# Altium PCB BRD131208.pcbdoc
Units mil, origin at the board's own origin, x right, y up, seen from the top; angles counter-clockwise.
Board outline 2755.91 x 3543.31 mil, 2 copper layers (Top Layer, Bottom Layer), stack 63.824 mil thick; 51 components, 43 nets, 173 pads, 53 vias.
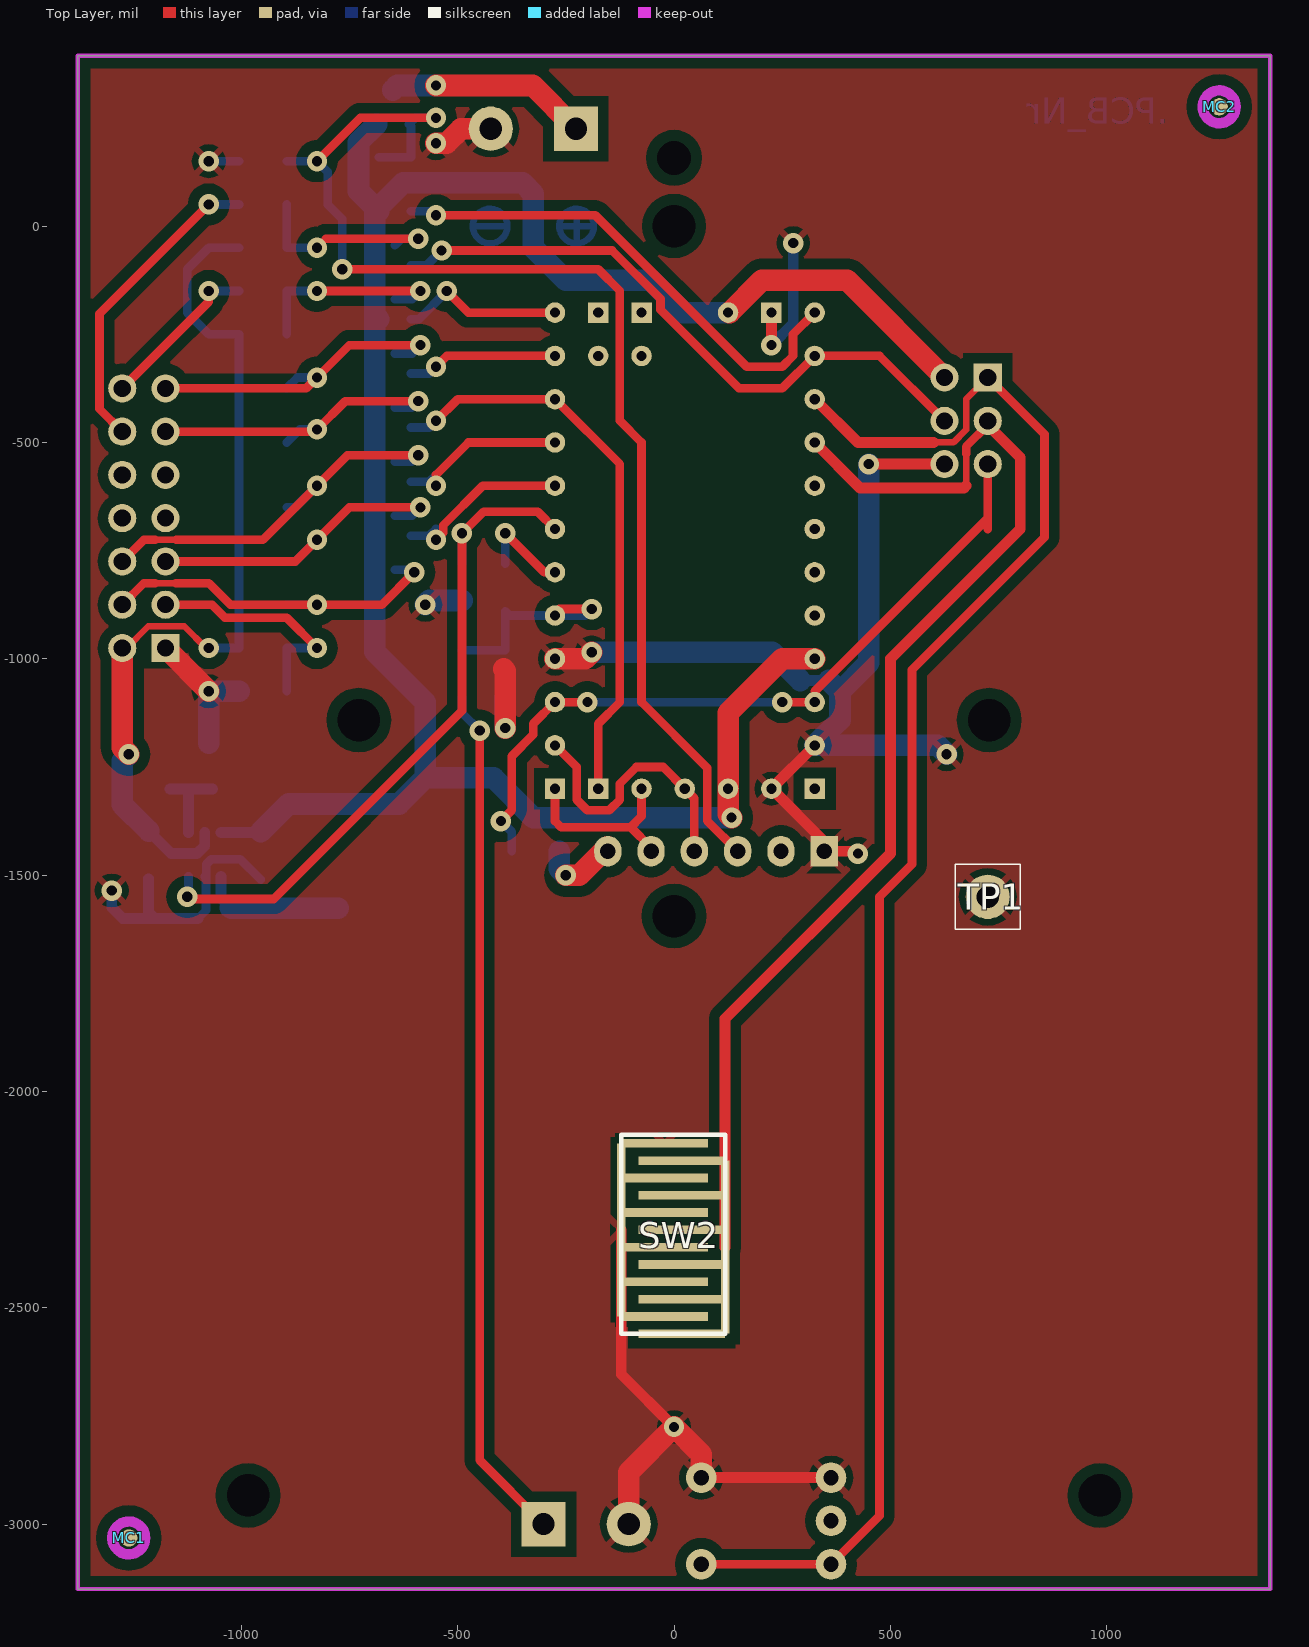
[diagram p0: Top Layer view]
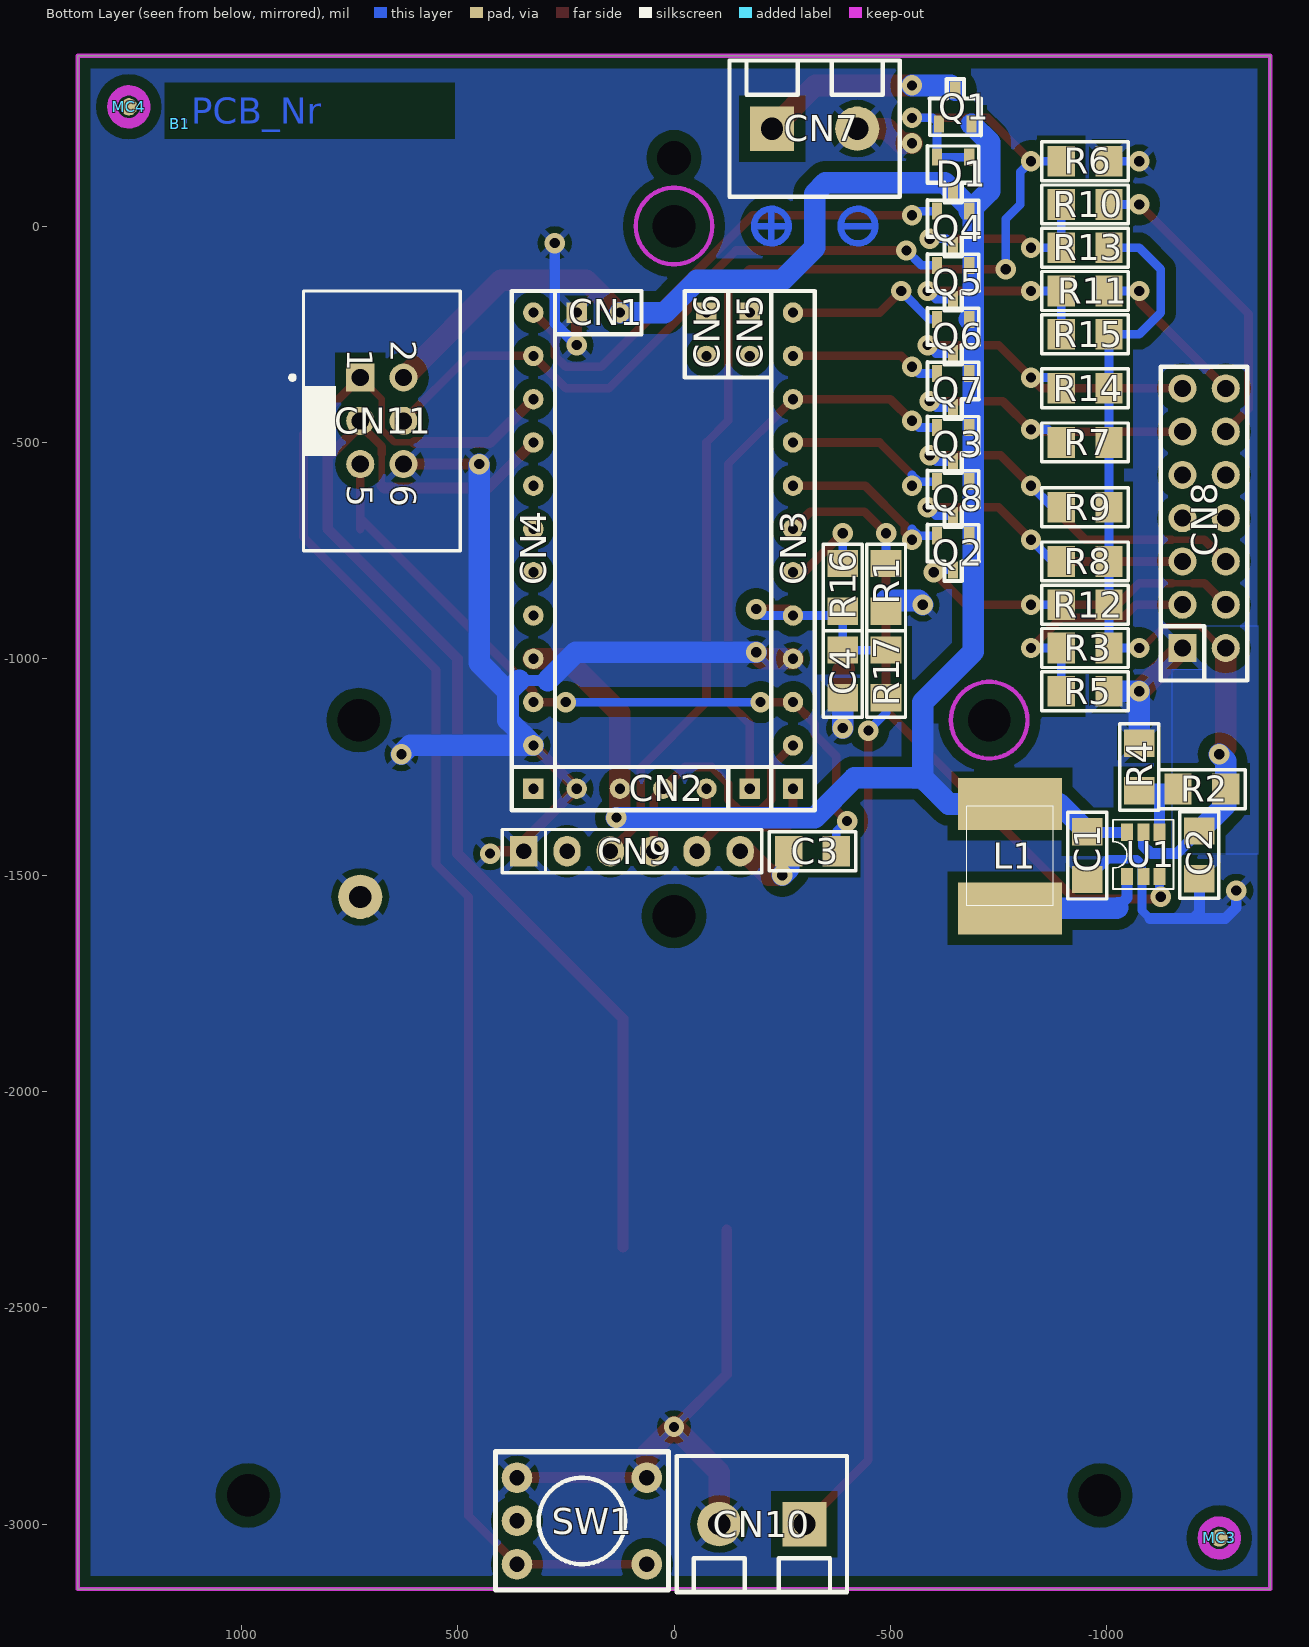
[diagram p1: Bottom Layer view, seen from below]
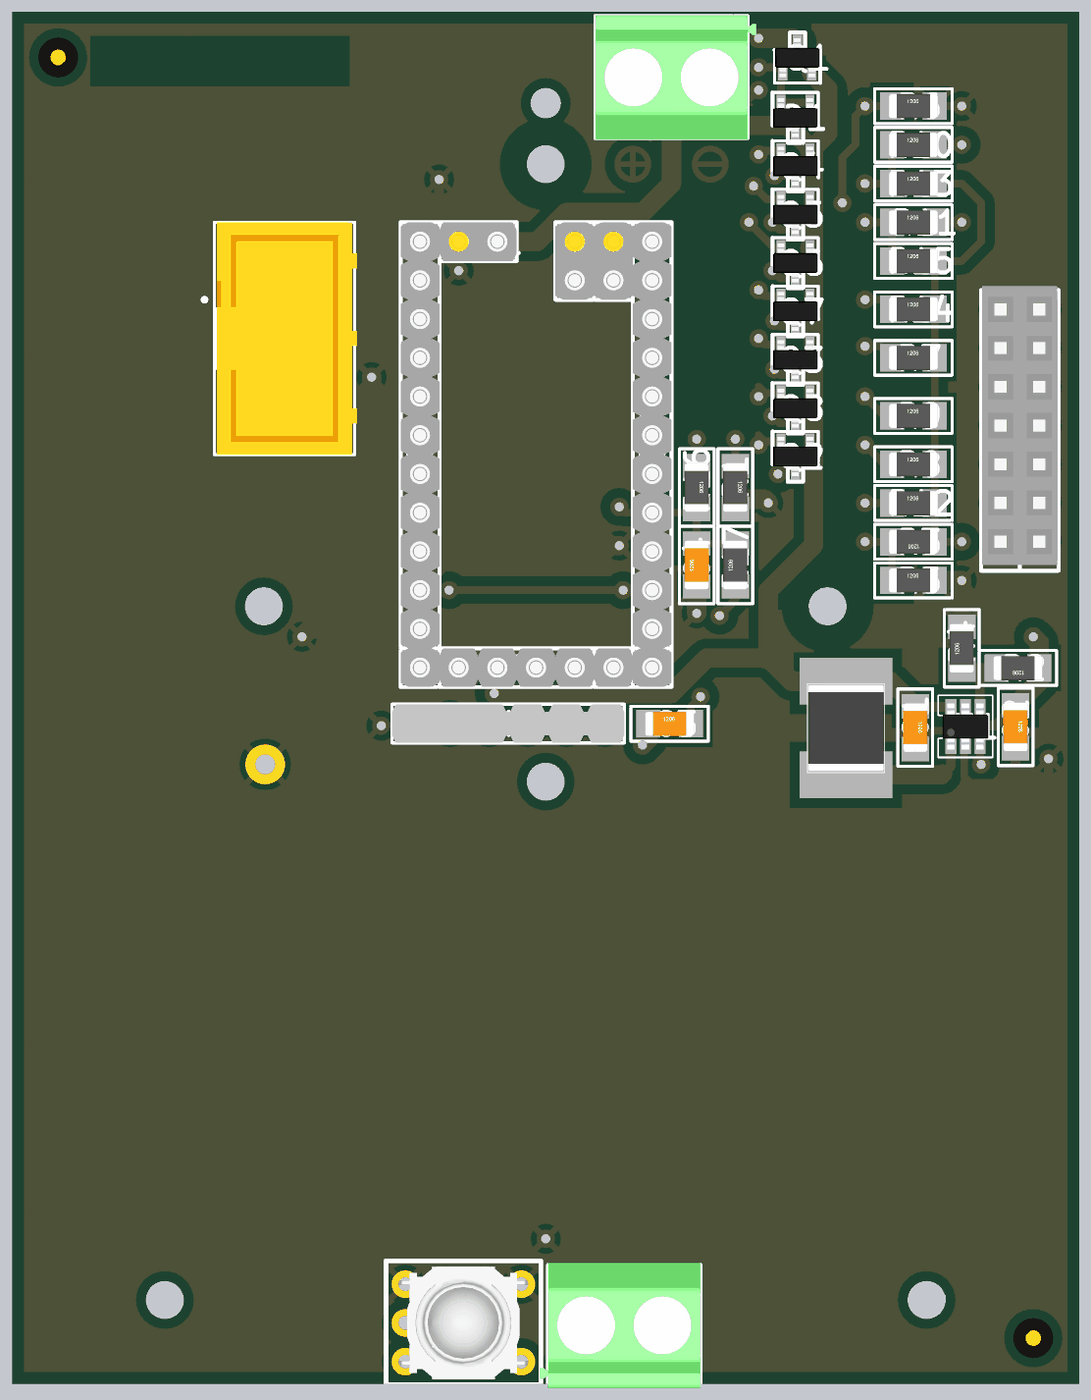
[diagram p2: 3D render of the assembled board from below, using the file's embedded part models]

## Layer stack, top to bottom
Top Layer: signal copper 1.4
Dielectric: core 61.0236, FR-4, Dk 4.8
Bottom Layer: signal copper 1.4

## Board outline
-1377.95,-3149.61 1377.95,-3149.61 1377.95,393.7 -1377.95,393.7

## Design rules (kind name [scope] priority, off if disabled: settings)
Clearance SC_SOT23-6 [HasFootprint('SC_SOT23-6') vs HasFootprint('SC_SOT23-6')] p1: gap=9
Clearance Clearance_polygons [InPolygon] p2: gap=25
Clearance Clearance_All [All] p3: gap=10
HoleSize [All] p1: absolutevalues=TRUE maxlimit=125.98 minlimit=23.62 maxpercent=80.000 minpercent=20.000
MinimumAnnularRing [All] p1: minimumring=10
MinimumSolderMaskSliver SilkscreenOverComponentPads [All] p2: minsoldermaskwidth=10
PlaneClearance [All] p1: clearance=50
PolygonConnect [All] p1: connectstyle=Relief reliefconductorwidth=15 reliefentries=4 polygonreliefangle="45 Angle" airgapwidth=15
RoutingVias [All] p1: holewidth=23.62 width=47.24 viastyle="Through Hole" minholewidth=23.62 minwidth=47.24 maxholewidth=23.62 maxwidth=47.24
SolderMaskExpansion [All] p1: expansion=0
Width [All] p1: maxlimit=50 minlimit=15 preferedwidth=20
26 further rules are at their usual default settings.

## Components (designator, comment, footprint, x,y, rotation, side; value= is the part's Value field where it differs from the comment)
B1 "BRD131208/1" MC_BoardNr 1141.73,236.22 r180 bottom
C1 "YCAM10U" CA_1206 -955,-1455 r270 bottom
C2 "YCAM10U" CA_1206 -1214,-1453 r270 bottom
C3 "YCAM100N" CA_1206 -320,-1445 r180 bottom
C4 "YCAM100N" CA_1206 -390,-1035 r90 bottom
CN1 "TS-102-G-AA" CN_TERMINALSTRIP_2P 225,-200 r180 bottom
CN2 "TS-105-G-A" CN_TERMINALSTRIP_5P -175,-1300 r0 bottom
CN3 "TS-112-G-A" CN_TERMINALSTRIP_12P -275,-1300 r90 bottom
CN4 "TS-112-G-A" CN_TERMINALSTRIP_12P 325,-1300 r90 bottom
CN5 "TS-102-G-AA" CN_TERMINALSTRIP_2P -175,-200 r270 bottom
CN6 "TS-102-G-AA" CN_TERMINALSTRIP_2P -75,-200 r270 bottom
CN7 "CNTRB002" "CN_MKDSN 1,5/2" -325,225 r180 bottom
CN8 "SSW-107-01-T-D" CN_SCKT2X7 -1175,-975 r90 bottom
CN9 "CNHDR036M3-1/6" CN_HDR1X6 347.05,-1444.5 r180 bottom
CN10 "CNTRB002" "CN_MKDSN 1,5/2" -202.95,-2999.61 r0 bottom
CN11 "0918_506_7324" CN_HARTING_918506X324 725,-350 r270 bottom
D1 "YDIOBAT54-1" SC_SOT23 -645,120 r270 bottom
L1 "4u7/2.7A" CL_STD_2220 -776,-1456 r270 bottom
MC1 "Fiducial" MC_FIDUCIAL -1259.84,-3031.5 r0 top
MC2 "Fiducial" MC_FIDUCIAL 1259.84,275.59 r0 top
MC3 "Fiducial" MC_FIDUCIAL -1259.84,-3031.5 r180 bottom
MC4 "Fiducial" MC_FIDUCIAL 1259.84,275.59 r180 bottom
Q1 "YTRS2035" SC_SOT23 -650,275 r90 bottom
Q2 "YTRSFDV301N" SC_SOT23 -645,-755 r270 bottom
Q3 "YTRSFDV301N" SC_SOT23 -645,-505 r270 bottom
Q4 "YTRSFDV301N" SC_SOT23 -645,-5 r270 bottom
Q5 "YTRSFDV301N" SC_SOT23 -645,-130 r270 bottom
Q6 "YTRSFDV301N" SC_SOT23 -645,-255 r270 bottom
Q7 "YTRSFDV301N" SC_SOT23 -645,-380 r270 bottom
Q8 "YTRSFDV301N" SC_SOT23 -645,-630 r270 bottom
R1 "YRES100K" RE_1206 -490,-835 r270 bottom
R2 "470K/1%" RE_1206 -1220,-1301 r0 bottom
R3 "YRES10K" RE_1206 -950,-975 r0 bottom
R4 "150K / 1%" RE_1206 -1075,-1250 r90 bottom
R5 "YRES330E" RE_1206 -950,-1075 r180 bottom
R6 "YRES100K" RE_1206 -950,150 r180 bottom
R7 "YRES100K" RE_1206 -950,-500 r180 bottom
R8 "YRES100K" RE_1206 -950,-775 r180 bottom
R9 "33K/1%" RE_1206 -950,-650 r180 bottom
R10 "YRES820E" RE_1206 -950,50 r180 bottom
R11 "YRES820E" RE_1206 -950,-150 r180 bottom
R12 "YRES100K" RE_1206 -950,-875 r180 bottom
R13 "YRES100K" RE_1206 -950,-50 r180 bottom
R14 "YRES100K" RE_1206 -950,-375 r180 bottom
R15 "YRES100K" RE_1206 -950,-250 r180 bottom
R16 "YRES0E" RE_1206 -390,-835 r270 bottom
R17 "YRES330E" RE_1206 -490,-1035 r90 bottom
SW1 "KSJ0M411" SW_KSJ-M 362.8,-2992.13 r180 bottom
SW2 "PCB" SW_PCB 118.11,-2099.61 r180 top
TP1 "CN001M1" CN_TP_TH_1.3mm 725,-1550 r0 top
U1 "MCP1640T-I/CHY" SC_SOT23-6 -1047,-1503 r90 bottom

## Footprints (in the part's own frame and the unit in brackets; to place one, negate y for a bottom-side part, rotate by r counter-clockwise, add the part's x,y. Pads: shape width x height; smd on the part's side, far side on the other; paste and mask are expansions set on the pad)
CA_1206 [mm] "Chip Capacitor; Body 3.2 x 1.6 mm (LxW typ)"
  rect 1.6x1.8 smd: 1(-1.4,0) 2(1.4,0)
  silkscreen extent -2.54,-1.14 2.54,1.14, body extent -1.6,-0.8 1.6,0.8, height 1
CL_STD_2220 [mm]
  rect 3.06x6.1 smd: 1(-3.065,0) 2(3.065,0)
  silkscreen extent -2.92,-2.54 2.92,2.54, body extent -2.85,-2.5 2.85,2.5, height 2.5
CN_HARTING_918506X324 [mm] "Connector; IDC, Low Profile Male Header, Thru-Hole; 6 Position; Vertical; Pitch 2.54 mm; Body 15.24 x 9.2 x 9.45 mm (LxWxH)"
  rect 1.65x1.65 hole 1: 1(0,0)
  round 1.65 hole 1: 2(0,2.54) 3(2.54,0) 4(2.54,2.54) 5(5.08,0) 6(5.08,2.54)
  silkscreen extent -5.08,-4.11 10.16,5.87, body extent -5.08,-3.18 10.16,6.02, height 9.45
CN_HDR1X6 [mm] "Connector; Header; 6 Position"
  rect 1.6x1.8 hole 0.9: 1(0,0)
  oval 1.6x1.8 hole 0.9: 2(2.54,0) 3(5.08,0) 4(7.62,0) 5(10.16,0) 6(12.7,0)
  silkscreen extent -1.27,-1.27 13.97,1.27, body extent -1.27,-1.27 13.97,1.27, height 9.26
"CN_MKDSN 1,5/2" [mm] "Printed screw termination blocks"
  rect 2.6x2.6 hole 1.3: 1(-2.5,0)
  round 2.6 hole 1.3: 2(2.5,0)
  silkscreen extent -5,-4 5,4, body extent -5,-4.1 5.57,4.05, height 10
CN_SCKT2X7 [mm] "Samtec SSW-107-01-T-D"
  rect 1.65x1.65 hole 1: 1(0,0)
  round 1.65 hole 1: 2(0,-2.54) 3(2.54,0) 4(2.54,-2.54) 5(5.08,0) 6(5.08,-2.54) 7(7.62,0) 8(7.62,-2.54) 9(10.16,0) 10(10.16,-2.54) 11(12.7,0) 12(12.7,-2.54) 13(15.24,0) 14(15.24,-2.54)
  silkscreen extent -1.91,-3.81 16.51,1.27, body extent -1.52,-3.75 16.76,1.21, height 8.51
CN_TERMINALSTRIP_2P [mm] "TS-102-G-A"
  rect 1.2x1.2 hole 0.6: 1(0,0)
  round 1.2 hole 0.6: 2(2.54,0)
  silkscreen extent -1.27,-1.27 3.81,1.27, body extent -1.27,-1.27 3.81,1.27, height 4.44
CN_TERMINALSTRIP_5P [mm] "TS-105-G-A / Samtec SS-105"
  rect 1.2x1.2 hole 0.6: 1(0,0)
  round 1.2 hole 0.6: 2(2.54,0) 3(5.08,0) 4(7.62,0) 5(10.16,0)
  silkscreen extent -1.27,-1.27 11.43,1.27, body extent -1.27,-1.27 11.43,1.27, height 4.44
CN_TERMINALSTRIP_12P [mm] "TS-112-G-A"
  rect 1.2x1.2 hole 0.6: 1(0,0)
  round 1.2 hole 0.6: 2(2.54,0) 3(5.08,0) 4(7.62,0) 5(10.16,0) 6(12.7,0) 7(15.24,0) 8(17.78,0) 9(20.32,0) 10(22.86,0) 11(25.4,0) 12(27.94,0)
  silkscreen extent -1.27,-1.27 29.21,1.27, body extent -1.27,-1.27 29.21,1.27, height 4.44
CN_TP_TH_1.3mm [mm]
  round 2.6 hole 1.3: 1(0,0)
  silkscreen extent -1.91,-1.91 1.91,1.91, body extent -2.98,-2.99 3,2.99, height 1
MC_BoardNr [mil] "Board number"
MC_FIDUCIAL [mil] "Fiducial"
  round 40 smd paste-3937.01 mask+31.5: 0(0,0)
  Top Layer keep-out circle w24: c0,0 r38
RE_1206 [mm] "Chip Resistor; Body 3.2 x 1.6 mm (LxW typ)"
  rect 1.6x1.8 smd: 1(-1.4,0) 2(1.4,0)
  silkscreen extent -2.54,-1.14 2.54,1.14, body extent -1.6,-0.8 1.6,0.8, height 1
SC_SOT23 [mm] "SOT23, 3-Leads, Body 2.9x1.3mm, Pitch 0.95mm, Lead Span 2.3mm, IPC High Density"
  rect 1x0.6 smd: 1(-1,0.95) 2(-1,-0.95) 3(1,0)
  silkscreen extent -1.65,-1.5 1.65,1.5, body extent -1.27,-1.46 1.27,1.46, height 0.99
SC_SOT23-6 [mil] "SC_SOT23-6"
  rect 40x28 smd: 1(0,0) 2(0,-37.5) 3(0,-75) 4(102,-75) 5(102,-37.5) 6(102,0)
  silkscreen extent -29,-108 131,32, body extent -8,-97 110,22, height 51
SW_KSJ-M [mm] "C&K SPST switch"
  round 1.8 hole 0.9: 0(0,0) 1(0,-2.54) 1(7.62,-2.54) 2(0,2.54) 2(7.62,2.54)
  silkscreen extent -1.27,-4.06 8.89,4.06, body extent -0.65,-3.7 8.27,3.7, height 6.63
SW_PCB [mil]
  rect 20x400 smd: 1(0,260) 2(240,220)
  rect 200x20 smd: 1(100,460) 1(100,300) 1(100,380) 1(100,220) 1(100,60) 1(100,140) 2(140,420) 2(140,180) 2(140,260) 2(140,340) 2(140,20) 2(140,100)
  silkscreen extent 0,0 240,460

## Part data
B1: library part BARE_PCB
CN3 CN4 CN9: "*"
D1: "Dual Schottky Barrier Diode Common Cathode"
L1: library part LQH55DN4R7M03L
R1 R3 R5 R6 R7 R8 R10 R11 R12 R13 R14 R15 R16 R17: "Resistor"
R2: library part CRCW1206470KFKEA, "Resistor"
R4: library part RC1206FR-07150KL, "Resistor"
R9: library part MCMR12X3302FTL, "Resistor"
SW2: library part PCB_SWITCH

## Free pads (board coordinates)
  round 0 hole 78.74 unplated mask+39.37: 0(0,157.48)
  round 0 hole 98.43 unplated mask+49.21: 1(0,0) 2(-728.35,-1141.73) 3(728.35,-1141.73) 4(0,-1594.49) 5(-984.25,-2933.07) 6(984.25,-2933.07)

## Via types
v1: diameter 47.24, hole 23.62, Top Layer to Bottom Layer, tented both sides, 53 vias

## Nets (pads, with @x,y where several pads share a name; then routed paths per layer and width w, separated by ;. In a path a pad name is that pad's centre, name@x,y a point inside that pad or via, vN(x,y) a via of type N, cw(c..) or ccw(c..) an arc to the next point about the centre after c; other vN are vias at no path point)
+5V: C1.1 CN1.2 CN2.4 CN4.4 CN11.2 D1.3 L1.1 Q1.2 Q2.1 Q3.1 Q4.1 Q5.1 Q6.1 Q7.1 Q8.1 U1.6 | length 5034.7
  Top Layer w50: CN1.2@128.26,-200 203.26,-125 400,-125 CN11.2 ; v1(133.1,-1366.9) 125,-1358.8 CN2.4 125,-1125 250,-1000 CN4.4
  Bottom Layer w25: U1.6 -956.12,-1401 C1.1
  Bottom Layer w50: C1.1 -890.45,-1335.33 L1.1 -635.33,-1335.33 -575,-1275 ; Q1.2 -687.4,235.36 -729.21,193.55 -729.21,81.18 Q4.1@-686.83,38.8 ; Q6.1 Q6.1@-691.81,-215.63 ; Q4.1 Q4.1@-686.83,38.8 ; CN1.2 21.74,-200 -53.26,-125 -250,-125 -325,-50 -325,75 -350,100 -625.63,100 D1.3 Q4.1@-686.83,38.8 ; v1(133.1,-1366.9) -325.19,-1366.9 -417.1,-1275 -575,-1275 ; Q6.1@-691.81,-215.63 -691.81,-983.19 -575,-1100 -575,-1275 ; Q6.1@-691.81,-215.63 -691.81,33.82 Q4.1@-686.83,38.8
+9V: CN4.1
AIN0: CN4.8
AIN1: CN4.7
AIN2: CN4.6
AIN3: CN4.5
AIN4: CN5.1
AIN5: CN6.1
AIN6: CN5.2
AIN7: CN6.2
DB4: CN8.11 Q7.3 R7.1 | length 755.3
  Top Layer w20: CN8.11 -830,-475 v1(-825,-470) -759.52,-404.52 v1(-591.16,-404.52)
  Bottom Layer w20: R7.1 -864.88,-470 v1(-825,-470) ; Q7.3 -606.01,-419.37 v1(-591.16,-404.52)
DB5: CN8.12 R10.2 | length 721.2
  Top Layer w20: CN8.12 -1327.48,-422.52 -1327.48,-202.48 v1(-1075,50)
  Bottom Layer w20: v1(-1075,50) R10.2
DB6: CN8.13 Q6.3 R14.1 | length 777.8
  Top Layer w20: CN8.13 -850,-375 v1(-825,-350) -750,-275 v1(-585.94,-275)
  Bottom Layer w20: R14.1 -869.88,-350 v1(-825,-350) ; Q6.3 -605.31,-294.37 v1(-585.94,-275)
DB7: CN8.14 R11.2 | length 377.7
  Top Layer w20: CN8.14 -1075,-175 v1(-1075,-150)
  Bottom Layer w20: v1(-1075,-150) R11.2
DIO2: C4.2 CN3.5 R16.2 R17.2 | length 475.1
  Top Layer w20: CN3.5@-265,-885 v1(-190,-885)
  Bottom Layer w20: R17.2 C4.2 R16.2 -380.12,-900 CN3.5 -205,-900 v1(-190,-885)
DIO3: CN3.6 R16.1 | length 222.2
  Top Layer w20: v1(-390,-710) -300,-800 CN3.6
  Bottom Layer w20: R16.1 v1(-390,-710)
DIO4: CN3.7 R1.1 U1.3 | length 1597.7
  Top Layer w20: v1(-1125,-1550) -1120,-1555 -925,-1555 -490,-1120 v1(-490,-710) -440,-660 -315,-660 CN3.7
  Bottom Layer w20: v1(-1125,-1550) -1122,-1547 U1.3 ; R1.1 v1(-490,-710)
DIO5: CN3.8 Q2.2 | length 400.6
  Top Layer w20: v1(-550,-725) -533.62,-708.62 -533.62,-691.93 -441.69,-600 CN3.8
  Bottom Layer w20: Q2.2 -565.63,-715.63 -550,-700
DIO6: CN3.9 Q8.2 | length 370.1
  Top Layer w20: -550,-575 -475,-500 CN3.9
  Bottom Layer w20: Q8.2 -565.63,-590.63 -550,-575
  other v1: -550,-600
DIO7: CN2.1 CN3.10 Q3.2 | length 1342.6
  Top Layer w20: v1(-550,-450) -500,-400 CN3.10 -125,-550 -125,-1100 -175,-1150 CN2.1
  Bottom Layer w20: Q3.2 -565.63,-465.63 v1(-550,-450)
DIO8: CN3.11 Q7.2 | length 349.4
  Top Layer w20: v1(-550,-325) -525,-300 CN3.11
  Bottom Layer w20: Q7.2 -565.63,-340.63 v1(-550,-325)
DIO9: CN3.12 Q6.2 | length 380.9
  Top Layer w20: v1(-525,-150) -475,-200 CN3.12
  Bottom Layer w20: Q6.2 -589.88,-215.63 -525,-150.75 v1(-525,-150)
DIO10: CN4.12 Q4.2 | length 1162.5
  Top Layer w20: v1(-550,25) -182.04,25 167.96,-325 250,-325 275,-300 275,-250 CN4.12
  Bottom Layer w20: Q4.2 -559.37,34.37 v1(-550,25)
DIO11: CN4.11 CN11.4 Q5.2 | length 1468.5
  Top Layer w20: v1@-518.62,-56.38 -143.09,-56.38 -31.38,-168.09 -31.38,-193.62 150,-375 250,-375 CN4.11 475,-300 CN11.4
  Bottom Layer w20: Q5.2 -571.31,-90.63 v1(-537.06,-56.38)
DIO12: CN4.10 CN11.1 SW1.1 | length 3845.7
  Top Layer w15: 600.02,-499.98 645.7,-499.98 674.98,-470.7 674.98,-400.02 CN11.1
  Top Layer w20: SW1.1@62.8,-3092.13 362.8,-3092.13 475,-2979.92 475,-1550 550,-1475 550,-1025 856.1,-718.9 856.1,-481.1 CN11.1
  Top Layer w25: CN4.10 425,-500 600,-500
DIO13: CN4.9 CN11.3 SW2.1 | length 2770.2
  Top Layer w15: 675,-600 675,-525.78
  Top Layer w20: 675,-525.78 675,-509.57 CN11.3@725,-459.57
  Top Layer w25: SW2.1@118.11,-2359.61 118.11,-1831.89 500,-1450 500,-1000 800,-700 800,-534.57 CN11.3@725,-459.57 ; CN4.9 429.98,-604.98 670.02,-604.98 675,-600
E: CN8.6 Q3.3 R9.1 | length 936.1
  Top Layer w15: -1199.22,-725 -1150,-725
  Top Layer w20: CN8.6 -1225,-725 -1199.22,-725 ; -1150,-725 -950,-725 v1(-825,-600) -754.52,-529.52 v1(-591.16,-529.52)
  Bottom Layer w20: R9.1 -875,-650 v1(-825,-600) ; Q3.3 -606.01,-544.37 v1(-591.16,-529.52)
GND: C1.2 C2.2 C4.1 CN1.1 CN2.5 CN3.4 CN4.2 CN7.2 CN8.1 CN9.1 CN10.2 CN11.6 R1.2 R4.2 R5.2 R6.2 SW1.2 SW2.2 TP1.1 U1.2 | length 5329.1
  Top Layer w25: SW2.2@-121.89,-2319.61 -121.89,-2653.11 v1(0,-2775) ; SW1.2@62.8,-2892.13 SW1.2@362.8,-2892.13 ; v1(225,-275) CN1.1 ; CN4.2 CN2.5 347.05,-1422.05 CN9.1 419.5,-1444.5 v1(425,-1450) ; v1(450,-550) CN11.6
  Top Layer w50: CN8.1 v1(-1075,-1075) ; v1(-550,191.38) -525.72,191.38 -492.1,225 CN7.2 ; -393.7,-1023.62 -390,-1027.32 v1(-390,-1160) ; CN3.4 -205,-1000 v1(-190,-985) ; CN10.2 -104.53,-2879.53 v1(0,-2775) 62.8,-2837.8 SW1.2@62.8,-2892.13
  Bottom Layer w20: -1100,-1600 -1081.38,-1581.38 -1081.38,-1506.12 U1.2 -1081,-1499.5 -1081,-1474.72 -1069.28,-1463 -1002.12,-1463 C1.2 ; v1(-1075,150) R6.2
  Bottom Layer w25: v1(-1299.21,-1535.43) -1299.21,-1574.8 -1274.02,-1600 -1200,-1600 ; C2.2 -1214,-1586 -1200,-1600 ; -1100,-1600 -1200,-1600 ; v1(225,-275) 275.59,-224.41 v1(275.59,-39.37) ; 292.1,-1050 357.91,-1050
  Bottom Layer w50: R4.2 v1(-1075,-1075) R5.2 ; v1(-575,-875) -565.12,-865.12 R1.2@-490,-865.12 ; v1(-390,-1160) C4.1 ; v1(-190,-985) 227.1,-985 292.1,-1050 ; 357.91,-1050 383.62,-1075.72 ; v1(450,-550) 450,-1009.34 383.62,-1075.72 ; v1(629.92,-1220.47) 609.45,-1200 CN4.2 383.62,-1141.38 383.62,-1075.72
NetC2_1: C2.1 CN8.2 R2.1 R3.1 R7.2 R8.2 R9.2 R12.2 R13.2 R14.2 R15.2 U1.5 | length 2061.2
  Top Layer w15: CN8.2 -1264.71,-975 -1214.73,-925.02 -1150.02,-925.02 -1131.76,-925 v1@-1081.76,-975
  Top Layer w50: CN8.2 -1275,-1205.31 v1(-1259.84,-1220.47)
  Bottom Layer w20: v1(-1075,-975) R3.1 R12.2 R8.2 R9.2 R7.2 R14.2 R15.2 -1075,-250 -1125,-200 -1125,-100 -1075,-50 R13.2
  Bottom Layer w25: C2.1 -1161.88,-1450 -1102.25,-1450 -1084.5,-1432.25 U1.5
  Bottom Layer w50: v1(-1259.84,-1220.47) -1275.12,-1235.75 R2.1 -1275.12,-1336.76 C2.1
NetC3_1: C3.1 CN9.6 | length 185.5
  Top Layer w50: v1(-250,-1500) -218.88,-1500 CN9.6@-152.95,-1434.06
  Bottom Layer w50: C3.1 -264.88,-1485.12 v1(-250,-1500)
NetCN7_1: CN7.1 Q1.3 | length 469.2
  Top Layer w50: v1(-550,325) -326.57,325 CN7.1
  Bottom Layer w50: Q1.3 -639.37,325 v1(-550,325)
NetCN8_3: CN8.3 R3.2 R5.1 | length 561.3
  Top Layer w20: CN8.3 -1067.43,-875 -1037.43,-905 -895,-905 v1(-825,-975)
  Bottom Layer w20: R5.1 R3.2 v1(-825,-975)
NetCN9_3: CN9.3 D1.1 D1.2 Q1.1 R6.1 | length 2944.5
  Top Layer w20: v1(-825,150) -725,250 v1(-550,250) ; v1(-766.38,-100) -175,-100 -125,-150 -125,-450 -75,-500 -75,-1100 77.05,-1252.05 77.05,-1374.5 CN9.3
  Bottom Layer w20: R6.1 v1(-825,150) -800,125 -800,50 -766.38,16.38 v1(-766.38,-100) ; D1.1 D1.2 Q1.1@-607.6,230.63 ; Q1.1 -598.23,250 v1(-550,250)
NetCN10_1: CN10.1 R17.1 | length 1987.6
  Top Layer w20: v1(-449.15,-1165.84) -449.15,-2851.83 CN10.1
  Bottom Layer w20: R17.1 -490,-1125 v1(-449.15,-1165.84)
NetL1_2: L1.2 U1.1 | length 330.8
  Bottom Layer w25: U1.1 -1047,-1553 -1025,-1575
  Bottom Layer w50: -1025,-1575 -1023.39,-1576.61 -776.06,-1576.61 L1.2
NetQ4_3: Q4.3 R10.1 R13.1 | length 443.2
  Top Layer w20: -804.52,-29.52 v1(-591.16,-29.52)
  Bottom Layer w20: R10.1 R13.1 v1(-825,-50) ; Q4.3 -630.15,-29.52 v1(-591.16,-29.52)
NetQ5_3: Q5.3 R11.1 R15.1 | length 476
  Top Layer w20: v1(-825,-150) v1(-585.94,-150)
  Bottom Layer w20: R15.1 R11.1 v1(-825,-150) ; Q5.3 -605.31,-169.37 v1(-585.94,-150)
NetR2_2: R2.2 R4.1 U1.4 | length 198.4
  Bottom Layer w25: R2.2 -1124,-1301 -1122,-1303 ; U1.4 -1122,-1303 ; R4.1@-1066.12,-1301 -1120,-1301 -1122,-1303
R/W: CN8.5 Q8.3 R8.1 | length 798.5
  Top Layer w20: CN8.5 -875,-775 v1(-825,-725) -750,-650 v1(-585.94,-650)
  Bottom Layer w20: R8.1 -875,-775 v1(-825,-725) ; Q8.3 -605.31,-669.37 v1(-585.94,-650)
RS: CN8.4 Q2.3 R12.1 | length 864.7
  Top Layer w15: -1199.22,-825 -1150.78,-825
  Top Layer w20: CN8.4 -1225,-825 -1199.22,-825 ; -1150.78,-825 -1075,-825 -1025,-875 v1(-825,-875) -675,-875 v1(-600,-800)
  Bottom Layer w20: R12.1 v1(-825,-875) ; Q2.3 -605.63,-794.37 v1(-600,-800)
RST: C3.2 CN3.3 CN4.3 CN11.5 | length 1722.8
  Top Layer w20: v1(-400,-1375) -375,-1350 -375,-1225 -325,-1175 -325,-1150 CN3.3 v1(-200,-1100) ; v1(250,-1100) CN4.3 ; 325,-1075 725,-675 ; 725,-700 CN11.5
  Bottom Layer w20: v1(-400,-1375) -375.12,-1399.88 C3.2 ; v1(-200,-1100) v1(250,-1100)
RX: CN2.3 CN3.2 CN9.4 | length 643.9
  Top Layer w20: CN3.2 -225,-1250 -225,-1325.53 -200.53,-1350 -149.47,-1350 -125,-1325.53 -125,-1288.31 -86.69,-1250 -25,-1250 CN2.3 47.05,-1322.05 CN9.4
TX: CN2.2 CN3.1 CN9.5 | length 430.2
  Top Layer w20: CN3.1 -275,-1375 -260.94,-1389.06 -100,-1389.06 ; CN2.2 -75,-1364.06 -100,-1389.06 ; CN9.5 -52.95,-1436.12 -100,-1389.06
pads on no net: CN8.7 CN8.8 CN8.9 CN8.10 CN9.2 MC1.0 MC2.0 MC3.0 MC4.0 SW1.0
copper on no net: | length 742.7
  Bottom Layer w15: -465,0 -385,0 ; -265,0 -185,0 ; -225,-40 -225,40 ; -385,0 ccw(c-425,0) -385,0 ; -185,0 ccw(c-225,0) -185,0

## Polygon pours and split planes (outlines as drawn)
NetC2_1 on Bottom Layer "netC2-1" (solid, remove dead copper, pour order 3): -1350,-925 -1225,-925 -1225,-1025 -1150,-1025 -1150,-1450 -1350,-1450
GND on Bottom Layer "+5V-gndint" (solid, remove dead copper, pour order 7): -1350,-1475 -1189.11,-1475 -1176.22,-1475 -1176.22,-1595.5 -1172.22,-1600 -550,-1600 -550,-1875 -1350,-1875 -1350,-1475
+5V on Bottom Layer "+5V-gndint" (solid, remove dead copper, pour order 5): -1075,-1350 -1075,-1425 -550,-1425 -550,-1150 -1075,-1150 -1075,-1346
GND on Bottom Layer "Bottom Layer-GND" (solid, remove dead copper, pour order 2): -1377.95,-3149.61 1377.95,-3149.61 1377.95,393.7 -1377.95,393.7
GND on Top Layer "gnd" (solid, remove dead copper, pour order 6): -1377.95,-3149.61 -1377.95,393.7 1377.95,393.7 1377.95,-3149.61 -1377.95,-3149.61

## Keep-outs
Bottom Layer:
  circle w10: c-728.35,-1141.73 r88.58
  circle w10: c0,0 r88.58
Keep-Out Layer:
  the board outline again, w10

## Silkscreen, mask and mechanical layers (free items; w line width, h text height)
Mechanical 1:
  circle w10: c984.25,-2933.07 r88.58
  circle w10: c-984.25,-2933.07 r88.58
  circle w10: c0,-1594.49 r88.58
  circle w10: c728.35,-1141.73 r88.58
  lines w10: -1181.1,-2834.65 -1181.1,-1811.02 1181.1,-1811.02 1181.1,-2834.65 -1181.1,-2834.65 ; -118.11,-2559.06 118.11,-2559.06 118.11,-2086.61 -118.11,-2086.61 -118.11,-2559.06
Mechanical 4:
  lines w5: -3540.16,-4842.52 -3740.16,-4842.52 ; -2340.16,707.48 -3540.16,707.48 ; -1840.16,-4842.52 -1840.16,-4642.52 ; -1840.16,707.48 -1840.16,907.48 ; -840.16,-4341.52 3659.84,-4341.52 ; -840.16,-4041.52 3659.84,-4041.52 ; -840.16,-3741.52 659.84,-3741.52 ; 59.84,-4842.52 59.84,-4642.52 ; 59.84,707.48 59.84,907.48 ; 659.84,-4641.52 659.84,-4041.52 659.84,-3441.52 ; 1959.84,-4842.52 1959.84,-4642.52 ; 1959.84,707.48 1959.84,907.48 ; 2759.84,-4641.52 2759.84,-4041.52 ; 3659.84,-4842.52 3859.84,-4842.52 ; -3740.16,-4842.52 -3740.16,907.48 3859.84,907.48 3859.84,-4842.52 ; -3740.16,-4842.52 3859.84,-4842.52 ; -3540.16,707.48 -3540.16,-4642.52 3659.84,-4642.52 3659.84,707.48 -3540.16,707.48 ; -840.16,-4641.52 -2240.16,-4641.52 -2240.16,-3441.52 -840.16,-3441.52 ; -840.16,-4641.52 3659.84,-4641.52 3659.84,-3441.52 659.84,-3441.52 ; -840.16,-4641.52 -840.16,-3441.52 ; -840.16,-3441.52 659.84,-3441.52 ; -3740.16,-1967.52 -3540.16,-1967.52 -3740.16,-1967.52 ; 3659.84,-1967.52 3859.84,-1967.52 3659.84,-1967.52
  text "A" at -2699.16,782.48 h70 r90
  text "B" at -807.16,782.48 h70 r90
  text "C" at 1102.84,782.48 h70 r90
  text "D" at 2992.84,782.48 h70 r90
  text "2" at -3605.16,-555.52 h70 r90
  text "2" at 3794.84,-555.52 h70 r90
  text "1" at -3605.16,-3415.52 h70 r90
  text "1" at 3794.84,-3415.52 h70 r90
  text "ENGINEER:" at -790.16,-3541.52 h45
  text "TITLE:" at 709.84,-3541.52 h45
  text ".ProjectNaam" at 959.84,-3809.52 h98.43
  text "PCB DESIGNER:" at -790.16,-3836.52 h45
  text ".DrawnByX" at -285.16,-3953.52 h98.43
  text "DATE:" at -790.16,-4141.52 h45
  text "PART NO.:" at 709.84,-4141.52 h45
  text "REV:" at 2809.84,-4141.52 h45
  text ".VariantName" at 1059.84,-4253.52 h78.74
  text ".PRINT_DATE" at -740.16,-4261.52 h70
  text ".RevisionNR" at 2811.84,-4274.52 h98.43
  text "FILE NAME:" at -790.16,-4441.52 h45
  text "DWG NO:" at 709.84,-4441.52 h45
  text "SCALE:" at 2809.84,-4441.52 h45
  text ".PCB_Nr" at 1062.84,-4537.52 h98.43
  text ".PCB_FILE_NAME_NO_PATH" at -740.16,-4561.52 h70
  text "A" at -2699.16,-4767.52 h70 r90
  text "B" at -807.16,-4767.52 h70 r90
  text "C" at 1102.84,-4767.52 h70 r90
  text "D" at 2992.84,-4767.52 h70 r90
Mechanical 5:
  lines w5: -3540.16,-4842.52 -3740.16,-4842.52 ; -3540.16,-4341.52 959.84,-4341.52 ; -3540.16,-4041.52 959.84,-4041.52 ; -2640.16,-4641.52 -2640.16,-4041.52 ; -1840.16,-4842.52 -1840.16,-4642.52 ; -1840.16,707.48 -1840.16,907.48 ; -540.16,-4641.52 -540.16,-4041.52 -540.16,-3441.52 ; -540.16,-3741.52 959.84,-3741.52 ; 59.84,-4842.52 59.84,-4642.52 ; 59.84,707.48 59.84,907.48 ; 1959.84,-4842.52 1959.84,-4642.52 ; 1959.84,707.48 1959.84,907.48 ; 2459.84,707.48 3659.84,707.48 ; 3659.84,-4842.52 3859.84,-4842.52 ; -3740.16,-4842.52 -3740.16,907.48 3859.84,907.48 3859.84,-4842.52 ; -3740.16,-4842.52 3859.84,-4842.52 ; -540.16,-3441.52 959.84,-3441.52 ; -540.16,-3441.52 -3540.16,-3441.52 -3540.16,-4641.52 959.84,-4641.52 ; 959.84,-4641.52 2359.84,-4641.52 2359.84,-3441.52 959.84,-3441.52 ; 959.84,-4641.52 959.84,-3441.52 ; 3659.84,707.48 3659.84,-4642.52 -3540.16,-4642.52 -3540.16,707.48 3659.84,707.48 ; -3740.16,-1967.52 -3540.16,-1967.52 -3740.16,-1967.52 ; 3659.84,-1967.52 3859.84,-1967.52 3659.84,-1967.52
  text "D" at -2873.16,782.48 h70 r270
  text "C" at -983.16,782.48 h70 r270
  text "B" at 926.84,782.48 h70 r270
  text "A" at 2818.84,782.48 h70 r270
  text "2" at -3675.16,-555.52 h70 r270
  text "2" at 3724.84,-555.52 h70 r270
  text "1" at -3675.16,-3415.52 h70 r270
  text "1" at 3724.84,-3415.52 h70 r270
  text "TITLE:" at -590.16,-3541.52 h45
  text "ENGINEER:" at 909.84,-3541.52 h45
  text ".ProjectNaam" at -805.16,-3801.52 h98.43
  text "PCB DESIGNER:" at 909.84,-3836.52 h45
  text ".DrawnByX" at 419.84,-3956.52 h98.43
  text "REV:" at -2690.16,-4141.52 h45
  text "PART NO.:" at -590.16,-4141.52 h45
  text "DATE:" at 909.84,-4141.52 h45
  text ".PRINT_DATE" at 859.84,-4261.52 h70
  text ".VariantName" at -986.16,-4267.52 h78.74
  text ".RevisionNR" at -2658.16,-4316.52 h98.43
  text "SCALE:" at -2690.16,-4441.52 h45
  text "DWG NO:" at -590.16,-4441.52 h45
  text "FILE NAME:" at 909.84,-4441.52 h45
  text ".PCB_FILE_NAME_NO_PATH" at 859.84,-4561.52 h70
  text ".PCB_Nr" at -895.16,-4571.52 h98.43
  text "D" at -2873.16,-4767.52 h70 r270
  text "C" at -983.16,-4767.52 h70 r270
  text "B" at 926.84,-4767.52 h70 r270
  text "A" at 2818.84,-4767.52 h70 r270
Mechanical 8:
  the board outline again, w10
Drill Drawing:
  lines w12: -3444.88,-3267.72 -3444.88,-3366.14 -3346.46,-3366.14 ; -3444.88,570.87 -3444.88,669.29 -3346.46,669.29 ; 3543.31,-3366.14 3641.73,-3366.14 3641.73,-3267.72 ; 3543.31,669.29 3641.73,669.29 3641.73,570.87
  text ".legend" at 1580,-3100 h60

## Dimensions
-1377.95,393.7 to 1377.95,393.7 on Mechanical 2
-1377.95,393.7 to -1377.95,-3149.61 on Mechanical 2

## Text inside footprints (layer, text, board x,y; h text height)
CN11: Bottom Overlay "2" at 654.53,-263.4 h59.06 r90; Bottom Overlay "1" at 754.53,-283.08 h59.06 r90; Bottom Overlay "6" at 654.53,-597.24 h59.06 r90; Bottom Overlay "5" at 754.53,-597.24 h59.06 r90